# EAGLE board BMSafeSlave (EAGLE 5.08)
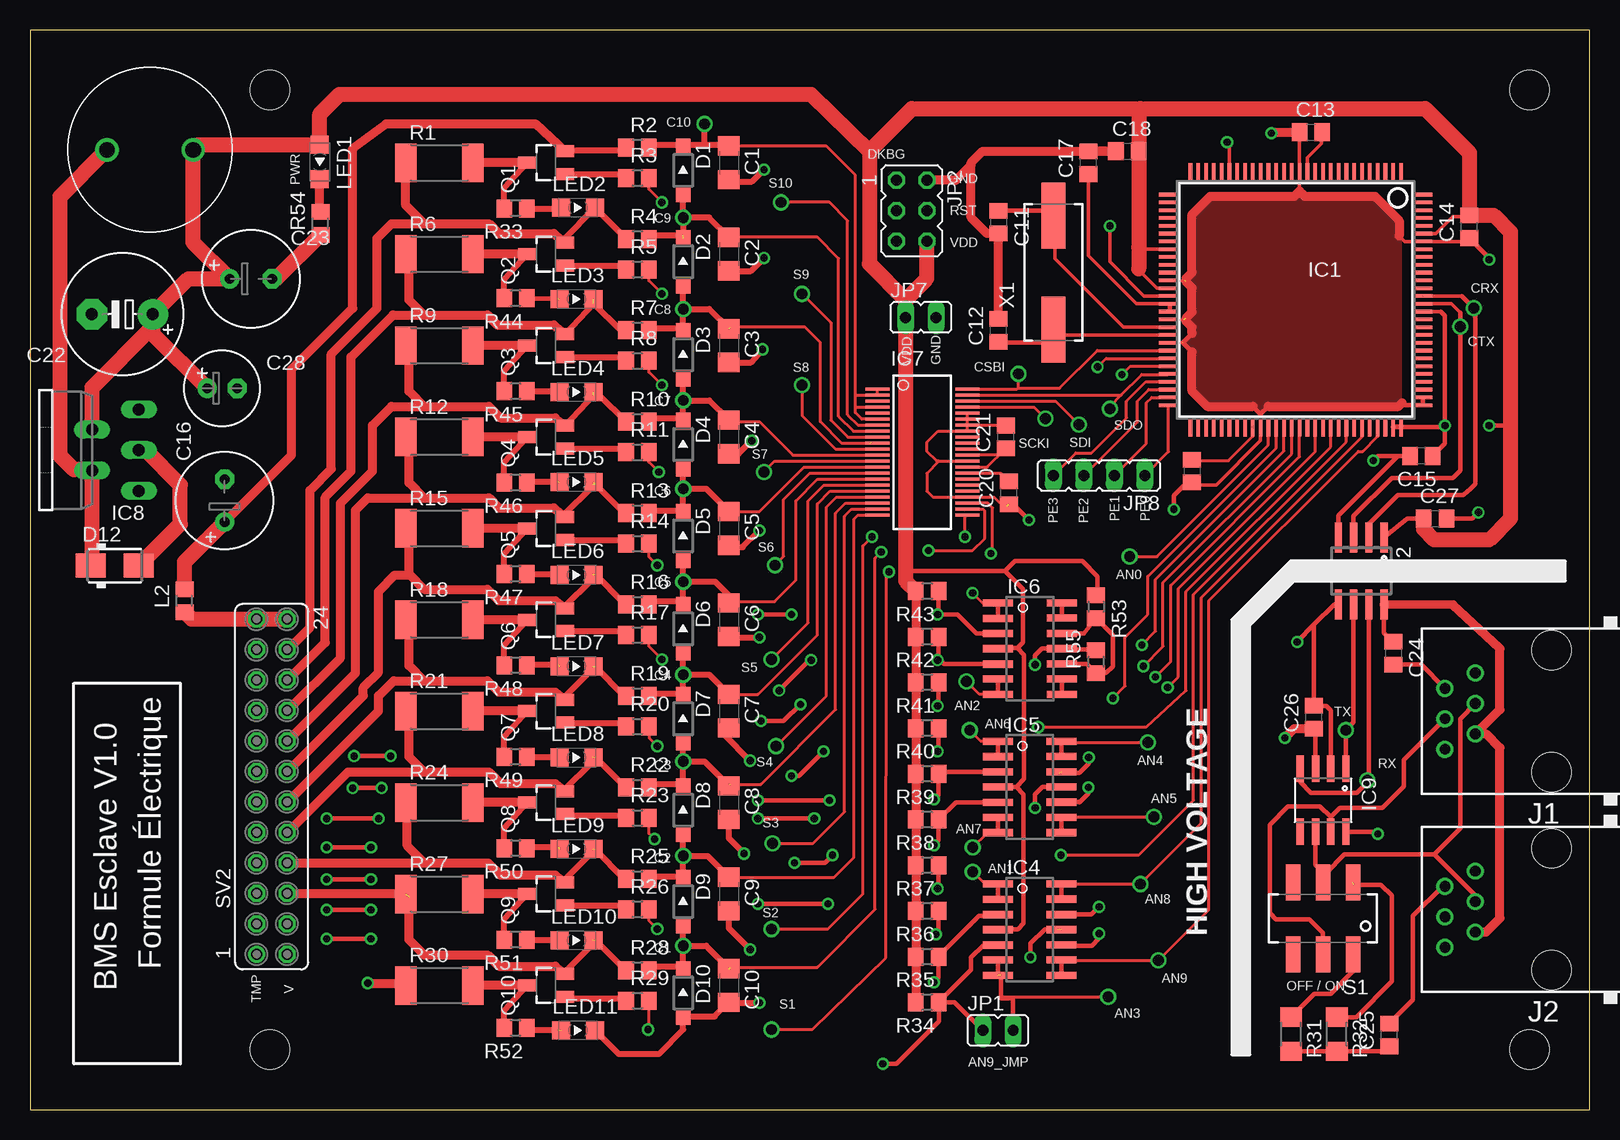
[diagram p0: board, top side]
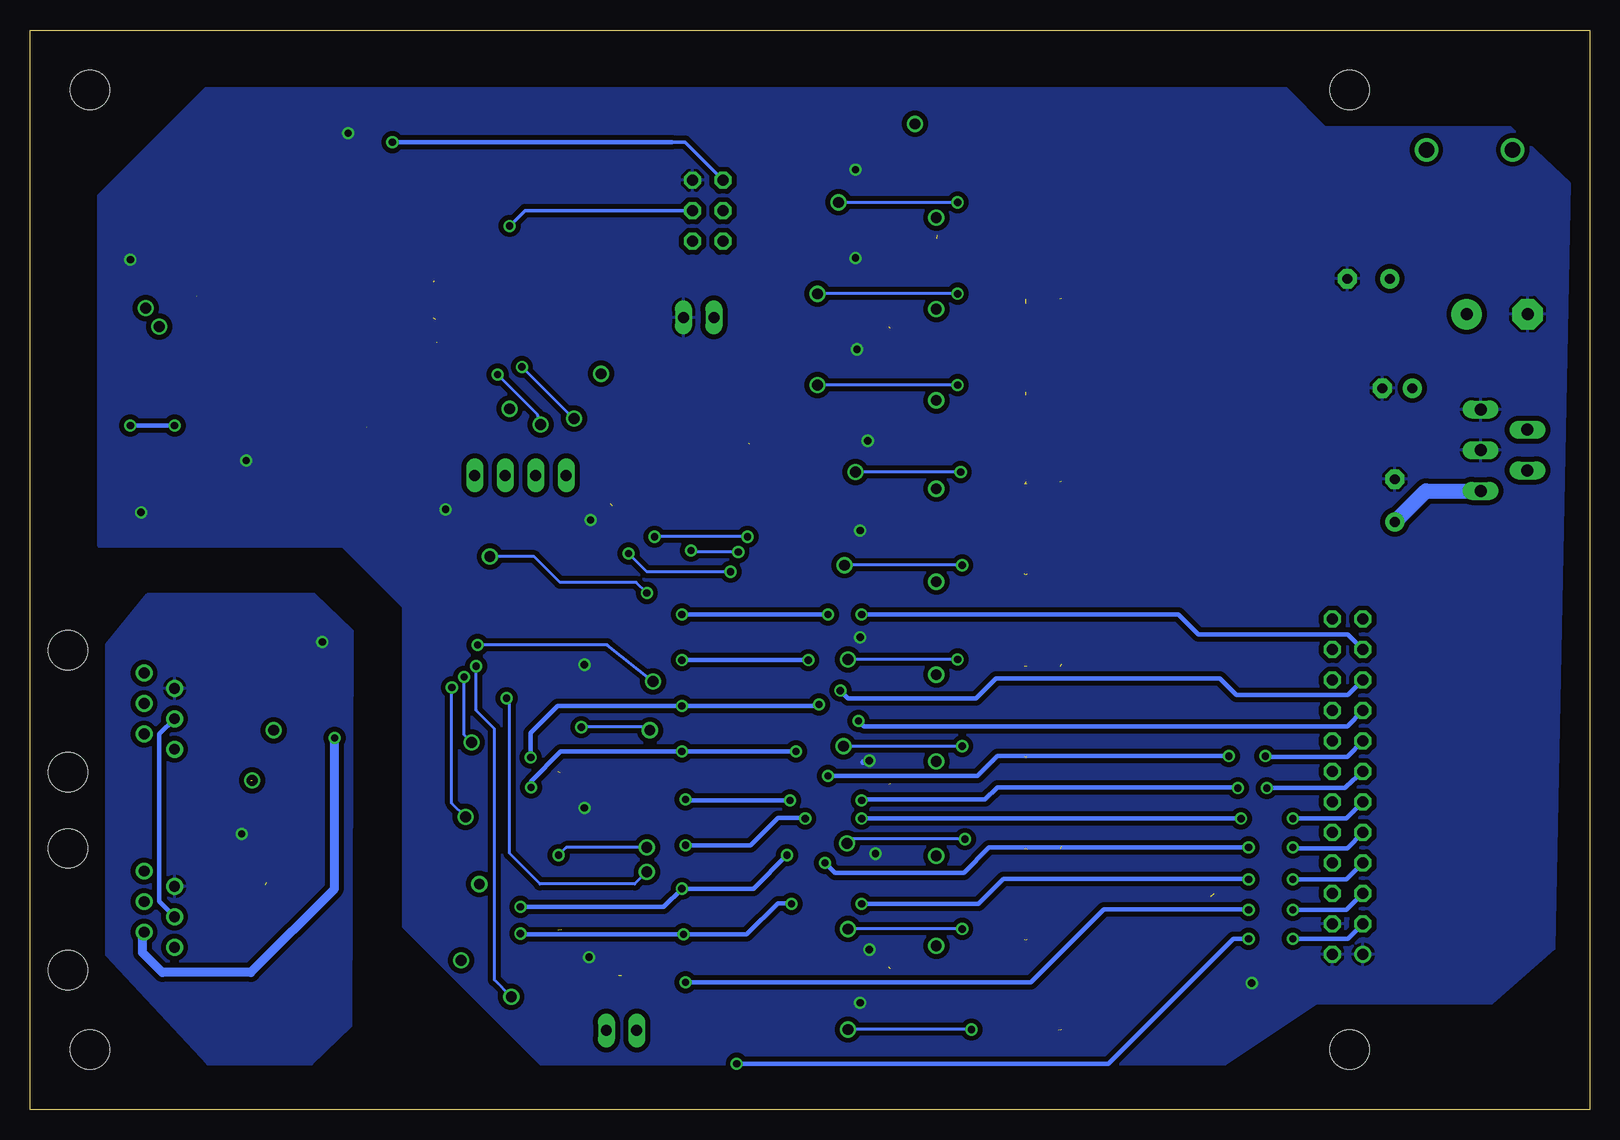
[diagram p1: board, bottom side, seen from below]

Size 130 x 90 mm. Coordinates in mm from the lower left corner, seen from the top.
Outline: 0,0 130,0 130,90 0,90 0,0
Copper layers (1*16): Top 0.035mm / dielectric 1.5mm / Bottom 0.035mm
Design rules "default *": minimum track width 8mil, minimum drill 23mil, track to track 8mil, track to pad 8mil, pad to pad 8mil, via to via 8mil, smd to smd 8mil, copper to edge 40mil, drill to drill 10mil, minimum pad ring 10mil, minimum via ring 8mil, stop-mask expansion 4mil, vias tented up to drill 0mil, thermal gap 10mil

## Footprints (pad centres in the part's own frame; a part is rotated, then mirrored left to right if it is on the bottom)
C1206 = smd 1.6 x 1.8: 1 -1.4,0; 2 1.4,0
C0805 = smd 1.3 x 1.5: 1 -0.95,0; 2 0.95,0
E3,5-8 = drill 0.813 pad 1.6 round: + -1.778,0 | drill 0.813 pad 1.6 octagon: - 1.778,0
E5-10,5 = drill 1.016 pad 2.54 round: + -2.54,0 | drill 1.016 pad 2.54 octagon: - 2.54,0
E2,5-6.3 = drill 0.813 pad 1.6 round: + -1.25,0 | drill 0.813 pad 1.6 octagon: - 1.25,0
SOD123 = smd 1.4 x 1.2: A 1.95,0; C -1.95,0
SMA = smd 2.5 x 2: A 2,0; C -2,0
SQFP-S-20X20-112 = smd 0.3 x 1.6: 1 -8.775,-10.6; 2 -8.125,-10.6; 3 -7.475,-10.6; 4 -6.825,-10.6; 5 -6.175,-10.6; 6 -5.525,-10.6; 7 -4.875,-10.6; 8 -4.225,-10.6; 9 -3.575,-10.6; 10 -2.925,-10.6; 11 -2.275,-10.6; 12 -1.625,-10.6; 13 -0.975,-10.6; 14 -0.325,-10.6; 15 0.325,-10.6; 16 0.975,-10.6; 17 1.625,-10.6; 18 2.275,-10.6; 19 2.925,-10.6; 20 3.575,-10.6; 21 4.225,-10.6; 22 4.875,-10.6; 23 5.525,-10.6; 24 6.175,-10.6; 25 6.825,-10.6; 26 7.475,-10.6; 27 8.125,-10.6; 28 8.775,-10.6; 57 8.775,10.6; 58 8.125,10.6; 59 7.475,10.6; 60 6.825,10.6; 61 6.175,10.6; 62 5.525,10.6; 63 4.875,10.6; 64 4.225,10.6; 65 3.575,10.6; 66 2.925,10.6; 67 2.275,10.6; 68 1.625,10.6; 69 0.975,10.6; 70 0.325,10.6; 71 -0.325,10.6; 72 -0.975,10.6; 73 -1.625,10.6; 74 -2.275,10.6; 75 -2.925,10.6; 76 -3.575,10.6; 77 -4.225,10.6; 78 -4.875,10.6; 79 -5.525,10.6; 80 -6.175,10.6; 81 -6.825,10.6; 82 -7.475,10.6; 83 -8.125,10.6; 84 -8.775,10.6 | smd 1.6 x 0.3: 29 10.6,-8.775; 30 10.6,-8.125; 31 10.6,-7.475; 32 10.6,-6.825; 33 10.6,-6.175; 34 10.6,-5.525; 35 10.6,-4.875; 36 10.6,-4.225; 37 10.6,-3.575; 38 10.6,-2.925; 39 10.6,-2.275; 40 10.6,-1.625; 41 10.6,-0.975; 42 10.6,-0.325; 43 10.6,0.325; 44 10.6,0.975; 45 10.6,1.625; 46 10.6,2.275; 47 10.6,2.925; 48 10.6,3.575; 49 10.6,4.225; 50 10.6,4.875; 51 10.6,5.525; 52 10.6,6.175; 53 10.6,6.825; 54 10.6,7.475; 55 10.6,8.125; 56 10.6,8.775; 85 -10.6,8.775; 86 -10.6,8.125; 87 -10.6,7.475; 88 -10.6,6.825; 89 -10.6,6.175; 90 -10.6,5.525; 91 -10.6,4.875; 92 -10.6,4.225; 93 -10.6,3.575; 94 -10.6,2.925; 95 -10.6,2.275; 96 -10.6,1.625; 97 -10.6,0.975; 98 -10.6,0.325; 99 -10.6,-0.325; 100 -10.6,-0.975; 101 -10.6,-1.625; 102 -10.6,-2.275; 103 -10.6,-2.925; 104 -10.6,-3.575; 105 -10.6,-4.225; 106 -10.6,-4.875; 107 -10.6,-5.525; 108 -10.6,-6.175; 109 -10.6,-6.825; 110 -10.6,-7.475; 111 -10.6,-8.125; 112 -10.6,-8.775
SOIC_N = smd 0.6 x 2.5: 1 -1.905,-2.79; 2 -0.635,-2.79; 3 0.635,-2.79; 4 1.905,-2.79; 5 1.905,2.79; 6 0.635,2.79; 7 -0.635,2.79; 8 -1.905,2.79
SO14 = smd 0.6 x 2.5: 1 -3.81,-2.65; 2 -2.53,-2.65; 3 -1.26,-2.65; 4 0,-2.65; 5 1.29,-2.65; 6 2.53,-2.65; 7 3.81,-2.65; 8 3.81,2.65; 9 2.53,2.65; 10 1.26,2.65; 11 0,2.65; 12 -1.26,2.65; 13 -2.55,2.65; 14 -3.81,2.65
LTC6802 = smd 2 x 0.25: A0 3.75,1.75; A1 3.75,2.25; A2 3.75,2.75; A3 3.75,3.25; C1 3.75,-4.75; C2 -3.75,-5.25; C3 -3.75,-4.25; C4 -3.75,-3.25; C5 -3.75,-2.25; C6 -3.75,-1.25; C7 -3.75,-0.25; C8 -3.75,0.75; C9 -3.75,1.75; C10 -3.75,2.75; C11 -3.75,3.75; C12 -3.75,4.75; CSBI 3.75,5.25; GPIO1 3.75,0.75; GPIO2 3.75,1.25; MMB 3.75,-0.25; NC 3.75,-3.25; S1 3.75,-4.25; S2 3.75,-5.25; S3 -3.75,-4.75; S4 -3.75,-3.75; S5 -3.75,-2.75; S6 -3.75,-1.75; S7 -3.75,-0.75; S8 -3.75,0.25; S9 -3.75,1.25; S10 -3.75,2.25; S11 -3.75,3.25; S12 -3.75,4.25; SCKI 3.75,3.75; SDI 3.75,4.25; SDO 3.75,4.75; TOS 3.75,-0.75; V+ -3.75,5.25; V- 3.75,-3.75; VREF 3.75,-1.75; VREG 3.75,-1.25; VTEMP1 3.75,-2.75; VTEMP2 3.75,-2.25; WDTB 3.75,0.25
TO220-51 = drill 1 long: 1 -3.4,-2.4; 2 -1.7,1.5; 3 0,-2.4; 4 1.7,1.5; 5 3.4,-2.4
SO8 = smd 0.61 x 2.21: 1 -1.905,-2.616; 2 -0.635,-2.616; 3 0.635,-2.616; 4 1.905,-2.616; 5 1.905,2.616; 6 0.635,2.616; 7 -0.635,2.616; 8 -1.905,2.616
RJ14 = drill 0.9 pad 1.4 round: 1 -3.175,8.89; 2 -1.905,6.35; 3 -0.635,8.89; 4 0.635,6.35; 5 1.905,8.89; 6 3.175,6.35 | hole 3.251: -5.08,0; 5.08,0
JP1 = drill 0.914 long: 1 0,-1.27; 2 0,1.27
JP3Q = drill 0.914 octagon: 1 -2.54,-1.27; 2 -2.54,1.27; 3 0,-1.27; 4 0,1.27; 5 2.54,-1.27; 6 2.54,1.27
STAND-OFF = hole 3.302: 0,0
JP4 = drill 0.914 long: 1 -3.81,0; 2 -1.27,0; 3 1.27,0; 4 3.81,0
18R105C = drill 1.3 round: 1 -3.6,0; 2 3.6,0
R0805 = smd 1.3 x 1.5: 1 -0.95,0; 2 0.95,0
1206_LED = smd 1.5 x 1.5: A -1.422,0; C 1.422,0
TSMT3 = smd 1 x 1.5: 1 -0.95,-1.6; 2 0.95,-1.6; 3 0,1.6
R2512 = smd 1.8 x 3.2: 1 -2.8,0; 2 2.8,0
R1206 = smd 1.6 x 1.803: 1 -1.422,0; 2 1.422,0
DPDT = smd 1.2 x 3: 1 -2.5,3; 2 0,3; 3 2.5,3; 4 -2.5,-3; 5 0,-3; 6 2.5,-3
FE12-2 = drill 0.914 round: 1 -13.97,1.27 | drill 0.914 octagon: 2 -13.97,-1.27; 3 -11.43,1.27; 4 -11.43,-1.27; 5 -8.89,1.27; 6 -8.89,-1.27; 7 -6.35,1.27; 8 -6.35,-1.27; 9 -3.81,1.27; 10 -3.81,-1.27; 11 -1.27,1.27; 12 -1.27,-1.27; 13 1.27,1.27; 14 1.27,-1.27; 15 3.81,1.27; 16 3.81,-1.27; 17 6.35,1.27; 18 6.35,-1.27; 19 8.89,1.27; 20 8.89,-1.27; 21 11.43,1.27; 22 11.43,-1.27; 23 13.97,1.27; 24 13.97,-1.27
CSM-7X = smd 5.5 x 2: 1 -4.75,0; 2 4.75,0

## Placement (x,y rotation side)
C1  100n  [C1206]  58.26,78.93 270 top
C2  100n  [C1206]  58.26,71.31 270 top
C3  100n  [C1206]  58.26,63.69 270 top
C4  100n  [C1206]  58.26,56.07 270 top
C5  100n  [C1206]  58.26,48.45 270 top
C6  100n  [C1206]  58.26,40.83 270 top
C7  100n  [C1206]  58.26,33.21 270 top
C8  100n  [C1206]  58.26,25.59 270 top
C9  100n  [C1206]  58.26,17.97 270 top
C10  100n  [C1206]  58.26,10.35 270 top
C11  18p  [C0805]  80.74,73.98 270 top
C12  18p  [C0805]  80.74,64.96 90 top
C13  220n  [C0805]  106.77,81.47 0 top
C14  100n  [C0805]  119.98,73.6 90 top
C15  100n  [C0805]  115.98,54.48 180 top
C16  100u  [E3,5-8]  16.22,50.77 90 top
C17  220n  [C0805]  88.23,78.93 90 top
C18  100n  [C0805]  91.47,79.88 0 top
C19  220n  [C0805]  96.87,53.23 270 top
C20  1u  [C0805]  81.6,51.42 90 top
C21  1u  [C0805]  81.35,56.07 90 top
C22  470u  [E5-10,5]  7.7,66.3 180 top
C23  220u  [E3,5-8]  18.41,69.25 0 top
C24  47n  [C0805]  113.63,38.04 270 top
C25  47n  [C0805]  113.31,6.22 90 top
C26  100n  [C0805]  107.03,32.7 90 top
C27  47n  [C0805]  117.12,49.28 0 top
C28  100u  [E2,5-6.3]  16.02,60.13 0 top
D1  DIODE_ZENER  [SOD123]  54.45,78.3 270 top
D2  DIODE_ZENER  [SOD123]  54.45,70.67 270 top
D3  DIODE_ZENER  [SOD123]  54.45,62.93 270 top
D4  DIODE_ZENER  [SOD123]  54.45,55.44 270 top
D5  DIODE_ZENER  [SOD123]  54.45,47.81 270 top
D6  DIODE_ZENER  [SOD123]  54.45,40.07 270 top
D7  DIODE_ZENER  [SOD123]  54.45,32.58 270 top
D8  DIODE_ZENER  [SOD123]  54.45,24.95 270 top
D9  DIODE_ZENER  [SOD123]  54.45,17.34 270 top
D10  DIODE_ZENER  [SOD123]  54.45,9.71 270 top
D12  MBRA340T3  [SMA]  7.08,45.34 0 top
IC1  MC9S12XD  [SQFP-S-20X20-112]  105.5,67.5 180 top
IC2  ADUM3211  [SOIC_N]  110.97,44.89 180 top
IC4  LM324DRG3D  [SO14]  83.33,15 270 top
IC5  LM324DRG3D  [SO14]  83.33,26.89 270 top
IC6  LM324DRG3D  [SO14]  83.36,38.42 270 top
IC7  LTC6802-2  [LTC6802]  74.39,54.8 0 top
IC8  TL2575_5  [TO220-51]  6.67,54.97 90 top
IC9  TJA1040  [SO8]  107.79,25.78 180 top
J1  RJ14  [RJ14]  126.84,33.21 90 top
J2  RJ14  [RJ14]  126.84,16.7 90 top
JP1  [JP1]  80.69,6.59 270 top
JP2  [JP3Q]  73.5,74.93 270 top
JP3  STAND-OFF  [STAND-OFF]  125,85 0 top
JP4  STAND-OFF  [STAND-OFF]  20,85 0 top
JP5  STAND-OFF  [STAND-OFF]  125,5 0 top
JP6  STAND-OFF  [STAND-OFF]  20,5 0 top
JP7  [JP1]  74.26,66.04 270 top
JP8  [JP4]  89.12,52.86 180 top
L1  1000u  [18R105C]  10,80.01 0 top
L2  [R0805]  12.88,42.42 90 top
LED1  LED  [1206_LED]  24.16,79 270 top
LED2  LED  [1206_LED]  45.69,75.18 0 top
LED3  LED  [1206_LED]  45.56,67.56 0 top
LED4  LED  [1206_LED]  45.56,59.82 0 top
LED5  LED  [1206_LED]  45.56,52.32 0 top
LED6  LED  [1206_LED]  45.56,44.58 0 top
LED7  LED  [1206_LED]  45.56,36.96 0 top
LED8  LED  [1206_LED]  45.56,29.34 0 top
LED9  LED  [1206_LED]  45.56,21.72 0 top
LED10  LED  [1206_LED]  45.56,14.1 0 top
LED11  LED  [1206_LED]  45.69,6.6 0 top
Q1  PMOS  [TSMT3]  43.02,78.93 90 top
Q2  PMOS  [TSMT3]  43.02,71.31 90 top
Q3  PMOS  [TSMT3]  43.02,63.69 90 top
Q4  PMOS  [TSMT3]  43.02,56.07 90 top
Q5  PMOS  [TSMT3]  43.02,48.45 90 top
Q6  PMOS  [TSMT3]  43.02,40.83 90 top
Q7  PMOS  [TSMT3]  43.02,33.21 90 top
Q8  PMOS  [TSMT3]  43.02,25.59 90 top
Q9  PMOS  [TSMT3]  43.02,17.97 90 top
Q10  PMOS  [TSMT3]  43.02,10.35 90 top
R1  10  [R2512]  34.13,78.93 0 top
R2  100  [R0805]  50.64,80.2 0 top
R3  3.3k  [R0805]  50.64,77.66 0 top
R4  100  [R0805]  50.64,72.58 0 top
R5  3.3k  [R0805]  50.64,70.04 0 top
R6  10  [R2512]  34.13,71.31 0 top
R7  100  [R0805]  50.64,64.96 0 top
R8  3.3k  [R0805]  50.64,62.42 0 top
R9  10  [R2512]  34.13,63.69 0 top
R10  100  [R0805]  50.64,57.34 0 top
R11  3.3k  [R0805]  50.64,54.8 0 top
R12  10  [R2512]  34.13,56.07 0 top
R13  100  [R0805]  50.64,49.72 0 top
R14  3.3k  [R0805]  50.64,47.18 0 top
R15  10  [R2512]  34.13,48.45 0 top
R16  100  [R0805]  50.64,42.1 0 top
R17  3.3k  [R0805]  50.64,39.56 0 top
R18  10  [R2512]  34.13,40.83 0 top
R19  100  [R0805]  50.64,34.48 0 top
R20  3.3k  [R0805]  50.64,31.94 0 top
R21  10  [R2512]  34.13,33.21 0 top
R22  100  [R0805]  50.64,26.86 0 top
R23  3.3k  [R0805]  50.64,24.32 0 top
R24  10  [R2512]  34.13,25.59 0 top
R25  100  [R0805]  50.64,19.24 0 top
R26  3.3k  [R0805]  50.64,16.7 0 top
R27  10  [R2512]  34.13,17.97 0 top
R28  100  [R0805]  50.64,11.62 0 top
R29  3.3k  [R0805]  50.64,9.08 0 top
R30  10  [R2512]  34.13,10.35 0 top
R31  60.4  [R1206]  105.12,6.29 270 top
R32  60.4  [R1206]  108.93,6.29 270 top
R33  475  [R0805]  40.48,75.12 180 top
R34  3k  [R0805]  74.8,8.93 180 top
R35  3k  [R0805]  74.8,12.74 180 top
R36  3k  [R0805]  74.8,16.55 180 top
R37  3k  [R0805]  74.8,20.36 180 top
R38  3k  [R0805]  74.8,24.17 180 top
R39  3k  [R0805]  74.8,27.98 180 top
R40  3k  [R0805]  74.8,31.79 180 top
R41  3k  [R0805]  74.8,35.6 180 top
R42  3k  [R0805]  74.8,39.41 180 top
R43  3k  [R0805]  74.8,43.22 180 top
R44  475  [R0805]  40.48,67.63 180 top
R45  475  [R0805]  40.48,59.88 180 top
R46  475  [R0805]  40.48,52.26 180 top
R47  475  [R0805]  40.48,44.64 180 top
R48  475  [R0805]  40.48,37.02 180 top
R49  475  [R0805]  40.48,29.4 180 top
R50  475  [R0805]  40.48,21.78 180 top
R51  475  [R0805]  40.48,14.16 180 top
R52  475  [R0805]  40.48,6.79 180 top
R53  3.3k  [R0805]  88.87,41.91 270 top
R54  475  [R0805]  24.21,73.88 90 top
R55  3.3k  [R0805]  88.87,37.34 90 top
S1  SWITCH_DPDT  [DPDT]  107.79,15.94 180 top
SV2  [FE12-2]  20.15,26.91 90 top
X1  CSM-7X  [CSM-7X]  85.31,69.79 90 top

## Library data of the parts
C1-C27 L2 R1-R55 = rcl
C28 D1-D10 IC1 IC2 IC4-IC9 J1 J2 LED1-LED11 Q1-Q10 S1 X1 = ELE4000_BMS
D12 = diode
JP1 JP2 JP7 JP8 = jumper
JP3-JP6 = SparkFun
L1 = bobineMurata
SV2 = con-lsta

## Nets
5V_BUS: C24.1 C26.1 IC2.8 IC9.3 J1.2 J2.2
5V_SLV: C14.2 C15.1 C18.2 C22.+ C23.+ C27.1 C28.+ IC1.36 IC1.41 IC1.83 IC1.84 IC1.97 IC1.107 IC2.1 IC4.4 IC5.4 IC6.4 IC8.4 JP2.6 JP7.1 L1.2 LED1.A R34.2 R35.2 R36.2 R37.2 R38.2 R39.2 R40.2 R41.2 R42.2 R43.2 R53.1
AN0: IC1.67 IC6.1 IC6.2
AN1: IC1.69 IC6.6 IC6.7
AN2: IC1.71 IC5.13 IC5.14
AN3: IC1.73 IC5.8 IC5.9
AN4: IC1.75 IC5.1 IC5.2
AN5: IC1.77 IC5.6 IC5.7
AN6: IC1.79 IC4.13 IC4.14
AN7: IC1.81 IC4.8 IC4.9
AN8: IC1.68 IC4.1 IC4.2
AN9: IC1.70 IC4.6 IC4.7 JP1.2
BKGD: IC1.23 JP2.1
CSBI: IC1.49 IC7.CSBI
EXTAL: C11.1 IC1.46 X1.2
GND_BUS: C24.2 C25.2 C26.2 IC2.5 IC9.2 IC9.8 J1.5 J2.5
GND_SLV: C1.2 C2.2 C3.2 C4.2 C5.2 C6.2 C7.2 C8.2 C9.2 C10.2 C11.2 C12.2 C13.1 C14.1 C15.2 C16.- C17.2 C18.1 C19.2 C20.1 C21.2 C22.- C23.- C27.2 C28.- D10.A D12.A IC1.14 IC1.40 IC1.45 IC1.48 IC1.66 IC1.85 IC1.86 IC1.106 IC2.4 IC4.11 IC5.11 IC6.11 IC7.A0 IC7.A1 IC7.A2 IC7.A3 IC7.TOS IC7.V- IC8.3 IC8.5 JP2.2 JP7.2 LED11.C R30.1 R54.1 R55.2 SV2.1 SV2.2 SV2.4
N$1: IC7.S5 R17.2
N$2: IC7.S10 R3.2
N$3: L2.1 SV2.23 SV2.24
N$4: Q1.3 R1.2 R33.2
N$5: D12.C IC8.2 L1.1
N$6: IC7.S9 R5.2
N$7: LED1.C R54.2
N$8: LED5.C Q5.2 R12.1 R13.1 SV2.16
N$9: IC4.5 JP1.1 R34.1 SV2.3
N$10: C20.2 IC7.VREF
N$11: IC6.13 IC6.14
N$12: IC6.8 IC6.9
N$13: R31.1 S1.1
N$14: Q1.1 R3.1
N$15: Q2.1 R5.1
N$16: Q2.3 R6.2 R44.2
N$17: LED2.C Q2.2 R1.1 R4.1 SV2.22
N$18: IC6.10 IC6.12 R53.2 R55.1
N$19: IC7.S8 R8.2
N$21: R32.1 S1.4
N$22: IC2.6 IC9.1
N$23: Q3.1 R8.1
N$24: Q3.3 R9.2 R45.2
N$25: LED3.C Q3.2 R6.1 R7.1 SV2.20
N$27: C16.+ IC8.1 L2.2 Q1.2 R2.1
N$28: C6.1 D5.A D6.C IC7.C5 R16.2
N$29: IC2.7 IC9.4
N$30: IC9.6 J1.4 J2.4 S1.5
N$31: IC9.7 J1.3 J2.3 S1.2
N$32: C25.1 R31.2 R32.2
N$33: Q4.1 R11.1
N$34: Q4.3 R12.2 R46.2
N$35: IC4.10 R36.1 SV2.7
N$37: LED4.C Q4.2 R9.1 R10.1 SV2.18
N$38: IC7.S6 R14.2
N$39: C7.1 D6.A D7.C IC7.C4 R19.2
N$41: IC7.S7 R11.2
N$42: IC4.12 R37.1 SV2.9
N$43: Q5.1 R14.1
N$44: Q5.3 R15.2 R47.2
N$45: C21.1 IC7.MMB IC7.VREG
N$46: LED11.A R52.1
N$47: C10.1 D9.A D10.C IC7.C1 R28.2
N$48: LED10.A R51.1
N$49: LED9.A R50.1
N$50: LED8.A R49.1
N$51: LED7.A R48.1
N$52: Q6.1 R17.1
N$53: Q6.3 R18.2 R48.2
N$54: LED6.C Q6.2 R15.1 R16.1 SV2.14
N$55: IC7.S4 R20.2
N$56: C8.1 D7.A D8.C IC7.C3 R22.2
N$57: LED6.A R47.1
N$58: Q7.1 R20.1
N$59: Q7.3 R21.2 R49.2
N$60: LED7.C Q7.2 R18.1 R19.1 SV2.12
N$61: IC7.S3 R23.2
N$62: C5.1 D4.A D5.C IC7.C6 R13.2
N$63: LED5.A R46.1
N$64: Q8.1 R23.1
N$65: LED4.A R45.1
N$66: Q8.3 R24.2 R50.2
N$67: LED8.C Q8.2 R21.1 R22.1 SV2.10
N$68: IC7.S2 R26.2
N$69: LED3.A R44.1
N$70: LED2.A R33.1
N$71: Q9.1 R26.1
N$72: Q9.3 R27.2 R51.2
N$73: LED9.C Q9.2 R24.1 R25.1 SV2.8
N$75: C9.1 D8.A D9.C IC7.C2 R25.2
N$76: IC5.5 R38.1 SV2.11
N$77: Q10.1 R29.1
N$78: Q10.3 R30.2 R52.2
N$79: LED10.C Q10.2 R27.1 R28.1 SV2.6
N$80: IC7.S1 R29.2
N$81: C4.1 D3.A D4.C IC7.C7 R10.2
N$82: C3.1 D2.A D3.C IC7.C8 R7.2
N$83: C2.1 D1.A D2.C IC7.C9 R4.2
N$84: C1.1 D1.C IC7.C10 IC7.C11 IC7.C12 IC7.V+ R2.2
N$85: IC5.3 R39.1 SV2.13
N$86: IC5.10 R40.1 SV2.15
N$87: IC5.12 R41.1 SV2.17
N$88: IC6.5 R42.1 SV2.19
N$89: IC6.3 R43.1 SV2.21
N$132: IC4.3 R35.1 SV2.5
PE0: IC1.56 JP8.1
PE1: IC1.55 JP8.2
PE2: IC1.54 JP8.3
PE3: IC1.53 JP8.4
RST: IC1.42 JP2.4
RXCAN_SLV: IC1.99 IC2.2
SCKI: IC1.50 IC7.SCKI
SDI: IC1.51 IC7.SDI
SDO: IC1.52 IC7.SDO
TXCAN_SLV: IC1.98 IC2.3
VDD1: C13.2 IC1.13
VDD2: C19.1 IC1.65
VDDPLL: C17.1 IC1.43 IC1.44
XTAL: C12.1 IC1.47 X1.1

## Tracks (layer width: path | path; a pad name or v marks a point on that pad's centre or on a via)
5V_BUS  (via drill 0.6)
  Top 0.381: IC2.8 112.87,39.75 C24.1 | IC9.3 107.16,31.62 C26.1
  Top 0.762: J2.2 121.38,14.79 122.52,15.94 122.52,30.16 121.38,31.3 J1.2 122.52,33.34 122.52,38.42 118.61,42.07 IC2.8 | C26.1 105.38,31.75 v104.61,30.99
  Bottom 0.381: 120.62,14.67 J2.2
  Bottom 0.762: v104.61,30.99 104.61,18.41 111.6,11.43 118.97,11.43 120.62,13.08 120.62,14.67
5V_SLV  (via drill 0.6)
  Top 0.203: R34.2 73.98,9.06 73.51,9.06 | R35.2 73.98,12.6 | R43.2 74.08,43.46 | 73.78,20.31 73.84,20.24 | 73.98,12.59 73.84,12.45 | 80.95,15.02 IC4.4 | IC1.84 114.28,56.83
  Top 0.254: R34.2 73.98,8.93 | R35.2 73.98,12.59 | R36.2 73.78,16.65 | R37.2 73.78,20.31 | 73.98,43.47 73.98,43.27 R43.2 | 81.01,38.47 IC6.4
  Top 0.305: IC1.41 93.92,68.47 92.42,69.98 | 92.58,71.72 IC1.36 | 117.59,66.53 IC1.97 | IC1.107 117.19,73.03 118.58,74.42 119.86,74.42
  Top 0.381: 82.31,38.47 82.77,38.92 82.77,43.4 81.27,44.89 | 82.31,38.47 81.01,38.47 | 82.21,26.89 IC5.4 | 82.21,26.89 82.87,27.55 82.87,37.91 82.31,38.47 | 82.21,26.89 82.82,26.28 82.82,15.51 82.34,15.02 80.95,15.02 | 81.27,44.89 82.1,45.72 87.72,45.72 88.99,44.45 88.99,42.99 R53.1 | 92.42,71.88 92.58,71.72 | 117.59,66.53 117.95,66.17 117.95,57.15 | C14.2 119.86,74.42 | IC2.1 114.81,49.28 C27.1 | 81.27,44.89 73.06,44.89 72.99,44.96 | 92.42,70.1 92.42,69.98 | 117.95,57.15 117.7,56.9 IC1.84 | C15.1 117.95,55.5 v117.95,57.02 117.95,57.15 | 123.41,57.02 v121.63,57.02
  Top 0.406: IC1.84 IC1.83
  Top 0.762: R43.2 R42.2 R41.2 R40.2 R39.2 R38.2 R37.2 | 73.84,20.24 R36.2 R35.2 | 73.84,12.45 R34.2 | 92.55,83.44 92.42,83.31 | 115.92,49.02 C27.1
  Top 1.016: 92.42,71.88
  Top 1.27: 69.97,79.92 65.12,84.64 25.81,84.64 24.16,83 LED1.A 14.01,80.42 L1.2 13.6,72.29 C23.+ 13.19,69.25 C22.+ | 69.97,79.92 73.5,83.44 92.55,83.44 116.3,83.44 119.98,79.76 C14.2 122.02,74.55 123.41,73.15 123.41,57.02 123.41,49.28 121.63,47.5 117.06,47.5 116.17,48.39 C27.1 | 92.42,83.31 C18.2 92.42,71.88 | 69.97,79.92 69.97,70.52 72.99,67.5 | R43.2 72.99,44.07 72.99,44.96 JP7.1 72.99,67.5 | 92.42,71.88 92.42,70.1 | 72.99,67.5 74.77,69.28 JP2.6 | C22.+ 10.24,64.66 C28.+ | C22.+ 10.24,65.26 5.17,60.2 IC8.4
  Bottom 0.381: v121.63,57.02 v117.95,57.02
AN0  (via drill 0.6, 0.9)
  Top 0.203: 80.1,42.35 80.83,42.35 IC6.1
  Top 0.254: 80.87,42.32 IC6.1 79.41,42.23 v78.58,43.05 | v91.66,46.1 93.95,46.1 103.23,55.38 IC1.67
  Top 0.381: IC6.1 IC6.2
  Bottom 0.254: v91.66,46.1 87.98,46.1 85.82,43.94 79.47,43.94 v78.58,43.05
AN1  (via drill 0.6, 0.9)
  Top 0.203: IC6.7 81.25,34.61 81.37,34.48
  Top 0.254: IC1.69 104.53,54.91 93.82,44.2 93.82,39.88 v92.68,38.73 | v78.07,35.69 79.15,34.61 IC6.7
  Top 0.381: IC6.7 IC6.6
  Bottom 0.254: v92.68,38.73 81.88,38.73 v78.07,35.69
AN2  (via drill 0.6, 0.9)
  Top 0.254: IC1.71 105.83,54.43 95.09,43.69 95.09,37.34 v93.82,36.07 | v93.19,30.61 85.82,30.61 IC5.14
  Top 0.381: IC5.13 IC5.14
  Bottom 0.254: v93.82,36.07 93.82,31.24 v93.19,30.61
AN3  (via drill 0.6, 0.9)
  Top 0.254: IC1.73 107.13,54.84 95.72,43.43 95.72,36.07 v94.84,35.18 | v93.69,24.38 85.76,24.38 IC5.9
  Top 0.381: IC5.8 IC5.9
  Bottom 0.254: v94.84,35.18 94.84,25.53 v93.69,24.38
AN4  (via drill 0.6 pad 0.3, 0.9)
  Top 0.254: IC1.75 108.43,55.25 96.36,43.18 96.36,34.92 93.06,31.88 v84.04,31.88 | v78.33,31.62 79.25,30.7 IC5.1
  Top 0.381: IC5.2 IC5.1
  Bottom 0.254: v84.04,31.88 78.58,31.88 v78.33,31.62
AN5  (via drill 0.6, 0.9)
  Top 0.254: IC1.77 109.73,55.66 97,42.93 97,25.78 92.42,21.21 v85.95,21.21 | 80.74,22.89 IC5.7 79.81,23.07 v78.58,21.84
  Top 0.381: IC5.7 IC5.6
  Bottom 0.254: v78.58,21.84 85.31,21.84 v85.95,21.21
AN6  (via drill 0.9)
  Top 0.254: 85.74,18.8 v92.55,18.8 97.63,23.88 97.63,42.67 111.03,56.07 IC1.79
  Top 0.305: IC4.14 85.74,18.8
  Top 0.381: IC4.13 IC4.14
AN7  (via drill 0.9)
  Top 0.254: IC1.81 112.36,56.87 112.36,56.13 111.09,54.86 110.71,54.86 98.27,42.42 98.27,16.64 v94.07,12.45 85.75,12.45 IC4.9
  Top 0.381: IC4.8 IC4.9
AN8  (via drill 0.6, 0.9)
  Top 0.254: IC1.68 103.88,55.14 93.19,44.45 93.19,41.27 91.28,39.37 91.28,35.31 v90.26,34.29 | v78.58,19.81 79.58,18.81 IC4.1
  Top 0.381: IC4.2 IC4.1
  Bottom 0.254: v78.58,19.81 79.58,18.81 87.48,18.81 90.01,21.34 90.01,34.04 v90.26,34.29
AN9  (via drill 0.6, 0.9)  (1 unrouted)
  Top 0.254: IC1.70 105.18,54.67 94.45,43.94 94.45,38.61 v92.8,36.96 | v89.88,9.4 81.06,9.4 80.93,9.27
  Top 0.381: IC4.7 IC4.6 | 80.92,11.19 80.93,9.27 81.95,9.27 JP1.2
  Bottom 0.254: v92.8,36.96 92.8,33.27 91.28,31.75 91.28,10.79 v89.88,9.4
BKGD  (via drill 0.6)
  Top 0.305: IC1.23 99.98,80.45 v99.79,80.64
  Bottom 0.305: 76.48,80.64 75.41,80.64 JP2.1
  Bottom 0.381: 76.48,80.64 v99.79,80.64
CSBI  (via drill 0.9)
  Top 0.254: IC1.49 88.96,63.27 85.82,60.13 82.35,60.13 | 82.35,60.13 82.39,60.17 v82.39,61.34 | IC7.CSBI 82.27,60.05 82.35,60.13
EXTAL
  Top 0.254: 85.44,74.41 X1.2 84.92,74.93
  Top 0.305: IC1.46 91.14,65.22 85.44,70.93 85.44,74.41
  Top 0.381: C11.1 84.92,74.93
GND_BUS  (via drill 0.6)
  Top 0.381: C25.2 115.28,9.14 115.28,16.13 117.76,18.61 J2.5 | C24.2 115.98,37.09 J1.5 | 107.03,40.42 C26.2 108.05,33.65 108.42,33.27 IC9.2 | IC9.8 112.18,23.16 v112.36,22.99 | v105.63,38.99 105.63,39.02 107.03,40.42 | 107.03,40.42 108.71,42.1 IC2.5
  pour Bottom (isolate 0.406): 103.09,39.88 106.27,42.93 120.23,42.93 123.67,38.73 123.67,12.9 115.21,3.81 106.52,3.81 103.22,6.99
GND_SLV  (via drill 0.6, 0.6 pad 0.3)  (5 unrouted)
  Top 0.203: IC1.85 116.03,58.73 | 102.58,57.98 102.56,58.05 | 58.77,77.15 58.36,77.56 C1.2
  Top 0.254: 96.06,63.94 95.04,63.94 IC1.48 | 105.81,81.42 C13.1 | 105.81,78.17 IC1.14 105.83,76.57 | C12.2 80.81,65.98 | 58.26,24.32 C8.2 | C7.2 58.26,31.64 | C6.2 58.26,39.36 | 58.26,46.88 C5.2 58.26,47.08 | C1.2 58.26,77.36 | 31.23,10.5 R30.1 31.44,10.3 | C10.2 58.26,8.88 | 58.26,16.39 C9.2 | IC6.11 85.68,38.34 | IC1.45 96.21,65.88 | IC1.40 96.26,69.12 | 102.61,58 102.58,57.98 | 88.81,38.34 R55.2 | IC1.66 | IC7.A1 81.32,57.05 C21.2 | 81.42,50.29 81.12,50.29 80.36,51.05 IC7.V- 75.28,51.05 74.77,51.56 74.77,53.03 75.79,54.05 | IC7.A3 IC7.A2 IC7.A1 | IC7.A1 IC7.A0 75.69,56.55 74.77,55.63 74.77,54.86 75.58,54.05 75.79,54.05 | 75.79,54.05 IC7.TOS
  Top 0.305: 114.14,72.83 114.6,72.38 IC1.106 119.71,72.38 | IC1.66 102.58,55.75 98.9,52.07 97.07,52.07 | 105.81,81.42 105.81,76.53 105.89,76.45
  Top 0.381: 57.88,32.06 57.88,32.19 C7.2 | R54.1 24.16,72.75 | 31.34,9.08 R30.1 | 96.87,63.18 96.11,63.94 96.87,64.71 | 101.95,58.61 102.58,57.98 | 85.68,38.34 88.81,38.34 | 102.61,58 103.22,58.61 | 119.71,72.38 C14.1 121.63,71 v121.63,70.87 | 114.39,58.93 114.6,58.73 IC1.85 IC1.86 | 97.07,52.07 C19.2 96.44,52.27 95.34,51.18 v95.34,50.04 | IC6.11 84.36,38.42 83.79,37.85 v83.79,37.08 | IC5.11 84.38,26.89 83.79,26.29 v83.79,25.15 | 85.7,15.02 84.59,15.02 83.41,13.84 v83.41,12.7 | IC2.4 109.06,49.53 114.01,54.48 | 114.01,54.48 C15.2 | C27.2 120.24,49.28 v120.74,49.78 | 114.01,54.48 112.36,54.48 v111.98,54.1 | C20.1 81.96,50.47 v83.28,49.15
  Top 0.508: LED11.C 49.08,4.63 52.42,4.63 54.45,6.67 D10.A 57.08,7.76 C10.2 58.06,8.75 | 58.26,77.36 60.18,77.36 v61.18,78.36 | C2.2 60.1,69.91 v61.18,70.99 | C3.2 60.1,62.29 v61.05,63.37 | C4.2 59.08,54.67 v60.16,55.75 | 58.26,46.88 59.41,46.88 v60.8,48.26 | 58.26,39.36 60.79,39.36 v60.8,39.37 | 58.26,16.39 58.26,15.11 v60.04,13.34 | 58.26,24.32 58.26,22.61 v59.53,21.34 | 57.88,32.19 57.88,31.24 v60.04,29.08 | 31.2,10.54 31.23,10.5 | 58.26,8.88 60.79,8.88 v60.8,8.89
  Top 0.762: 78.45,78.74 78.45,74.36 79.78,73.03 C11.2 C12.2 | 78.45,78.74 78.45,78.93 79.41,79.88 90.01,79.88 | 105.83,76.57 105.39,76.14 98.39,76.14 96.87,74.61 96.87,69.79 96.36,69.28 | 96.87,63.18 96.87,59.88 98.14,58.61 101.95,58.61 | 96.87,64.71 96.87,65.21 96.36,65.72 | 96.36,65.98 96.87,66.48 96.87,68.52 96.36,69.02 | 105.76,76.39 106.01,76.39 106.27,76.14 112.11,76.14 114.14,74.1 114.14,72.83 | 105.81,81.42 103.48,81.42 v103.47,81.41 | 103.22,58.61 114.08,58.61 114.39,58.93 | 46.98,6.48 LED11.C 47.21,6.5 | 90.01,79.88 C18.1 | C17.2 90.01,79.88 | v28.16,10.54 31.2,10.54 | JP2.2 77.18,77.47 78.45,78.74
  Top 1.27: D12.A 12.54,48.8 12.54,52.07 9.64,54.97 IC8.3 | C23.- 20.54,69.25 R54.1
  Bottom 0.381: v121.63,70.87 121.76,70.74 | v95.34,50.04 95.09,49.78
  Bottom 0.508: v60.04,29.08 60.55,28.96
  pour Top: 105.5,76.2 98.39,76.2 96.87,74.68 96.87,69.6 96.49,69.22 96.49,69.09 97,68.58 97,66.67 96.87,66.55 96.87,66.42 96.36,65.91 96.36,65.66 96.87,65.15 96.87,64.77 96.11,64.01 96.11,63.75 96.74,63.12 96.74,60.07 98.27,58.55 102.2,58.55 102.58,58.17 102.71,58.17 103.09,58.55 114.27,58.55 114.27,73.91 111.98,76.2 106.27,76.2 105.89,76.58
  pour Bottom (isolate 0.406): 2.92,13.42 1.65,77.22 6.57,81.87 22.02,81.87 25.24,85.09 115.41,85.09 124.3,76.2 124.3,46.99 103.98,46.99 98.9,41.91 98.9,15.24 87.47,3.81 30.32,3.81 22.7,8.89 8.12,8.89
N$1  (via drill 0.6, 0.9)
  Top 0.254: R17.2 51.59,38.61 v52.67,37.53 | v61.82,37.53 64.86,40.58 64.86,50.74 66.18,52.05 IC7.S5
  Bottom 0.254: v52.67,37.53 v61.82,37.53
N$2  (via drill 0.6 pad 0.3, 0.9)
  Top 0.254: 51.76,77.56 R3.2 51.59,76.71 v52.67,75.63 | v62.6,75.63 66.64,75.63 68.17,74.1 68.17,57.91 69.03,57.05 IC7.S10
  Bottom 0.254: v62.6,75.63 v52.67,75.63
N$3
  Top 1.27: SV2.24 SV2.23 13.47,40.88 L2.1
N$4
  Top 0.508: Q1.3 39.53,76.84 R33.2
  Top 0.762: Q1.3 R1.2
N$5
  Top 1.27: D12.C 5.17,45.43 IC8.2 5.11,53.34 3.65,53.34 2.51,54.48 2.51,76.12 L1.1
N$6  (via drill 0.6 pad 0.3, 0.9)
  Top 0.254: R5.2 51.59,69.09 v52.67,68.01 | IC7.S9 68.19,56.05 66.77,57.47 66.77,65.59 v64.36,68.01
  Bottom 0.254: v52.67,68.01 v64.36,68.01
N$7
  Top 0.762: LED1.C 24.16,74.75 R54.2
N$8  (2 unrouted)
  Top 0.203: 31.59,55.81 R12.1
  Top 0.254: 46.88,51.95 46.88,52.16 | 44.44,49.52 Q5.2 44.24,49.52 | R13.1 49.52,49.72 | R12.1 31.44,56.02
  Top 0.381: SV2.16 21.43,30.67
  Top 0.508: 44.44,49.52 46.88,51.95 | 49.52,49.72 47.08,52.16
  Top 0.762: 32.86,50.99 31.59,52.26 31.59,55.81 | 21.43,30.67 27.14,36.38 27.14,49.97 28.16,50.99 32.86,50.99 | 32.86,50.99 38.26,50.99 39.08,50.16 43.66,50.16 Q5.2
N$9  (via drill 0.6 pad 0.3)
  Top 0.381: v71.09,3.81 72.23,3.81 75.79,7.37 75.79,8.89 R34.1 | R34.1 77.08,8.93 JP1.1 | R34.1 78.45,11.63 78.45,12.7 79.46,13.71 IC4.5 | v24.73,14.22 v28.41,14.22
  Bottom 0.381: SV2.3 20.14,14.22 v24.73,14.22 | v71.09,3.81 40.1,3.81 29.68,14.22 v28.41,14.22
N$10
  Top 0.254: IC7.VREF 80.92,53.05 C20.2
N$11
  Top 0.381: IC6.14 IC6.13
N$12
  Top 0.381: IC6.8 IC6.9
N$13
  Top 0.381: R31.1 107.07,9.65 108.42,9.65 110.29,11.52 S1.1
N$14
  Top 0.254: 49.37,77.98 R3.1
  Top 0.508: Q1.1 49.37,77.98
N$15
  Top 0.254: 49.37,70.36 R5.1
  Top 0.508: Q2.1 49.37,70.36
N$16
  Top 0.508: Q2.3 39.53,69.22 R44.2
  Top 0.762: Q2.3 R6.2
N$17
  Top 0.381: SV2.22 21.43,38.29 | Q2.2 44.42,72.5 | 49.69,72.6 R4.1
  Top 0.508: 44.42,72.5 LED2.C 49.69,72.6
  Top 0.762: 21.43,38.29 23.34,40.2 23.34,51.62 25.11,53.4 25.11,62.99 28.92,66.8 28.92,72.64 30.13,73.85 32.86,73.85 | 32.86,73.85 31.33,75.38 R1.1 | 32.86,73.85 38.26,73.85 39.08,73.03 43.66,73.03 Q2.2
N$18
  Top 0.254: R55.1 89.69,36.39
  Top 0.381: IC6.10 88.1,37.16 R55.1 | 89.69,36.39 90.26,36.96 90.26,39.56 R53.2 87.84,39.68 IC6.12
N$19  (via drill 0.6, 0.9)
  Top 0.254: R8.2 51.59,61.47 v52.67,60.39 | v64.36,60.39 64.36,57.85 67.15,55.05 70.12,55.05 IC7.S8
  Bottom 0.254: v52.67,60.39 v64.36,60.39
N$21  (1 unrouted)
  Top 0.381: 110.33,18.73 112.62,18.73 113.5,17.84 113.5,10.67 110.55,7.71 R32.1
N$22  (via drill 0.9)
  Top 0.381: IC2.6 110.33,32.26 v109.69,31.62 IC9.1
N$23
  Top 0.254: 49.37,62.74 R8.1
  Top 0.508: Q3.1 49.37,62.74
N$24
  Top 0.508: Q3.3 39.53,61.6 R45.2
  Top 0.762: Q3.3 R9.2
N$25  (1 unrouted)
  Top 0.203: 31.59,71.05 R6.1
  Top 0.381: SV2.20 21.48,35.8 | 49.22,64.96 R7.1
  Top 0.508: Q3.2 46.98,67.2 49.22,64.96
  Top 0.762: 32.86,66.23 31.59,67.5 31.59,71.05 | 21.48,35.8 24.61,38.92 24.61,51.05 26.76,53.21 26.76,62.74 30.26,66.23 32.86,66.23 | 32.86,66.23 38.13,66.23 38.96,65.41 43.66,65.41 Q3.2
N$27
  Top 0.254: 49.52,80 49.52,80.2 R2.1 | Q1.2 44.44,80
  Top 0.381: Q1.2 42.2,82.11
  Top 0.508: 44.44,80 49.52,80 | 26.9,80.05 26.86,79.95
  Top 0.762: Q1.2 42.13,82.17 29.68,82.17 26.9,80.13 26.9,80.05 26.9,66.81 21.81,61.72 21.81,54.58 C16.+
  Top 1.27: L2.2 12.88,45.65 C16.+
  Bottom 1.27: C16.+ 13.64,51.57 IC8.1
N$28  (via drill 0.9)
  Top 0.203: 58.26,42.86 58.77,42.35
  Top 0.254: 51.76,42.41 51.76,42.2 R16.2 | 54.4,42.41 D6.C | IC7.C5 65.66,52.55 63.85,50.74 63.85,44.13 62.07,42.35 58.77,42.35
  Top 0.381: 58.26,42.86 C6.1
  Top 0.508: 51.76,42.41 54.4,42.41 | D6.C v54.45,44.01 | v54.45,44.01 D5.A | v54.45,44.01 57.12,44.01 58.26,42.86
N$29  (via drill 0.9)  (1 unrouted)
  Top 0.381: IC2.7 111.6,27.43 110.58,26.42 106.77,26.42 105.89,27.3 IC9.4
  other vias: 111.47,27.43
N$30
  Top 0.203: S1.5 108.04,18.94 108.04,19.49 108.04,19.75
  Top 0.381: 108.04,19.49 107.16,20.38 IC9.6 | 108.04,19.75 109.57,21.27 117.06,21.27 | J1.4 119.22,32.58 119.22,23.43 117.06,21.27 | J2.4 120.49,17.84 117.06,21.27
N$31
  Top 0.381: J1.3 114.52,29.15 114.52,26.92 112.74,25.15 109.19,25.15 108.42,24.38 | S1.2 107.79,14.73 106.65,15.88 103.85,15.88 103.34,16.38 103.34,23.75 104.87,25.27 107.54,25.27 108.42,24.38 | 108.42,24.38 IC9.7
  Bottom 0.381: J2.3 119.22,17.34 119.22,31.3 J1.3
N$32
  Top 0.381: R31.2 R32.2 112.91,4.86 C25.1
N$33
  Top 0.381: 49.37,55.12 R11.1
  Top 0.508: Q4.1 49.37,55.12
N$34
  Top 0.508: Q4.3 39.53,53.98 R46.2
  Top 0.762: Q4.3 R12.2
N$35  (via drill 0.6, 0.6 pad 0.3)
  Top 0.381: IC4.10 85.82,13.65 88.52,13.65 89.12,14.25 v89.12,14.67 | v75.53,14.61 75.75,14.82 R36.1 | v24.73,19.18 v28.41,19.18 | v60.67,17.14 v66.52,17.14
  Bottom 0.381: SV2.7 20.26,19.18 v24.73,19.18 | v28.41,19.18 28.48,19.24 48.86,19.24 50.96,17.14 v60.67,17.14 | v66.52,17.14 66.58,17.21 67.66,17.21 70.26,14.61 v75.53,14.61 89.06,14.61 v89.12,14.67
N$37  (1 unrouted)
  Top 0.203: 31.59,63.43 R9.1
  Top 0.381: SV2.18 21.43,33.21 | 46.98,59.58 47.45,59.58
  Top 0.508: Q4.2 46.98,59.58 | 47.45,59.58 R10.1
  Top 0.762: 32.86,58.61 31.59,59.88 31.59,63.43 | 21.43,33.21 25.88,37.66 25.88,50.55 28.54,53.21 28.54,57.02 30.13,58.61 32.86,58.61 | 32.86,58.61 38.26,58.61 39.21,57.66 43.78,57.66 Q4.2
N$38  (via drill 0.6, 0.9)
  Top 0.254: v52.29,45.38 51.59,46.08 R14.2 | v62.09,45.38 62.83,46.11 62.83,50.86 65.02,53.05 IC7.S6
  Bottom 0.254: v52.29,45.38 v62.09,45.38
N$39  (via drill 0.9)
  Top 0.254: 51.76,34.68 51.76,34.48 R19.2 | 54.4,34.68 D7.C | IC7.C4 66.69,51.55 65.63,50.48 65.63,39.56 60.67,34.61 C7.1
  Top 0.508: 51.76,34.68 54.4,34.68 | D7.C v54.45,36.26 | v54.45,36.26 D6.A | v54.45,36.26 56.61,36.26 C7.1
N$41  (via drill 0.6, 0.9)
  Top 0.203: R11.2 51.76,54.8
  Top 0.254: IC7.S7 62.08,54.05 v61.18,53.15 | v52.42,53.15 51.59,53.98 R11.2
  Bottom 0.254: v52.42,53.15 v61.18,53.15
N$42  (via drill 0.6, 0.6 pad 0.3)
  Top 0.381: 75.25,20.36 R37.1 75.75,18.5 v75.66,18.41 | IC4.12 88.49,16.26 v89.12,16.89 | v24.73,21.84 v28.41,21.84 | v63.72,20.57 66.26,20.57 v66.9,21.21
  Bottom 0.381: SV2.9 20.2,21.78 24.67,21.78 v24.73,21.84 | v28.41,21.84 50.07,21.84 52.16,19.75 62.9,19.75 v63.72,20.57 | v66.9,21.21 69.69,18.41 v75.66,18.41 77.18,16.89 v89.12,16.89
N$43
  Top 0.381: 49.37,47.5 R14.1
  Top 0.508: Q5.1 49.37,47.5
N$44
  Top 0.508: Q5.3 39.53,46.36 R47.2
  Top 0.762: Q5.3 R15.2
N$45
  Top 0.254: IC7.VREG 79.78,53.55 C21.1 80.78,54.55 IC7.MMB
N$46  (1 unrouted)
  Top 0.254: R52.1 41.6,6.64
  Top 0.508: 41.6,6.64 44.04,6.64
N$47  (via drill 0.6, 0.9)  (1 unrouted)
  Top 0.254: 51.76,11.93 51.76,11.72 R28.2 | 54.4,11.93 D10.C | 58.38,11.87 65.63,11.87 70.45,16.7 70.45,45.97 v70.96,46.48 | 78,50.05 IC7.C1 77.9,50.04 79.47,50.04 79.6,49.91 79.6,47.62 78.58,46.61 v74.9,46.61
  Top 0.508: 51.76,11.93 54.4,11.93 | D10.C v54.45,13.65 | v54.45,13.65 D9.A | v54.45,13.65 56.36,13.65 C10.1
  Bottom 0.254: v70.96,46.48 74.77,46.48 v74.9,46.61
N$48
  Top 0.381: 44.08,14.16 LED10.A
  Top 0.508: R51.1 44.08,14.16
N$49  (1 unrouted)
  Top 0.254: R50.1 41.6,21.88
  Top 0.508: 41.6,21.88 44.04,21.88
N$50
  Top 0.381: 44.08,29.4 LED8.A
  Top 0.508: R49.1 44.08,29.4
N$51  (1 unrouted)
  Top 0.254: R48.1 41.6,37.12
  Top 0.508: 41.6,37.12 44.04,37.12
N$52
  Top 0.381: 49.37,39.88 R17.1
  Top 0.508: Q6.1 49.37,39.88
N$53
  Top 0.508: Q6.3 39.53,38.74 R48.2
  Top 0.762: Q6.3 R18.2
N$54  (2 unrouted)
  Top 0.203: 31.59,48.19 R15.1
  Top 0.254: 46.88,44.23 46.88,44.64 | Q6.2 44.44,41.8 | R16.1 49.52,42.2
  Top 0.381: SV2.14 21.43,28.13
  Top 0.508: 44.44,41.8 46.88,44.23 | 49.52,42.2 47.08,44.64
  Top 0.762: 31.68,44.55 31.59,44.64 31.59,48.19 | 31.68,44.55 32.86,43.37 38.13,43.37 39.08,42.42 43.78,42.42 Q6.2 | 21.43,28.13 27.78,34.48 27.78,35.18 29.05,36.45 29.05,43.18 30.41,44.55 31.68,44.55
N$55  (via drill 0.6, 0.9)
  Top 0.203: 51.66,31.94 R20.2
  Top 0.254: v52.29,30.29 51.66,30.92 51.66,31.94 | v62.2,30.29 66.39,34.48 66.39,50.23 67.21,51.05 IC7.S4
  Bottom 0.254: v52.29,30.29 v62.2,30.29
N$56  (via drill 0.9)  (1 unrouted)
  Top 0.254: 51.76,27.16 51.76,26.96 R22.2 | 54.4,27.16 D8.C | 58.38,27.11 60.93,27.11 67.15,33.34 67.15,49.72 67.98,50.55 IC7.C3 | 58.26,27.16 58.06,27.37 C8.1 58.26,27.16
  Top 0.381: C8.1 58.26,27.37
  Top 0.508: 51.76,27.16 54.4,27.16 | D8.C v54.45,29.02 | v54.45,29.02 D7.A | v54.45,29.02 56.23,29.02 C8.1
N$57
  Top 0.381: 44.08,44.64 LED6.A
  Top 0.508: R47.1 44.08,44.64
N$58
  Top 0.254: 49.52,32.24 49.52,32.04 R20.1 | Q7.1 44.44,32.24
  Top 0.508: 44.44,32.24 49.52,32.24
N$59
  Top 0.254: R49.2 39.57,29.4
  Top 0.508: Q7.3 39.53,31.12 R49.2
  Top 0.762: Q7.3 R21.2
N$60  (2 unrouted)
  Top 0.203: 31.59,40.57 R18.1
  Top 0.254: 46.88,36.72 46.88,36.92 | Q7.2 44.44,34.28 | R19.1 49.52,34.48
  Top 0.381: SV2.12 21.43,25.59
  Top 0.508: 44.44,34.28 46.88,36.72 | 49.52,34.48 47.08,36.92
  Top 0.762: 32.86,35.75 31.59,37.02 31.59,40.57 | 21.43,25.59 29.05,33.21 29.05,34.48 30.32,35.75 32.86,35.75 | 32.86,35.75 38.13,35.75 39.08,34.8 43.78,34.8 Q7.2
N$61  (via drill 0.6, 0.9)
  Top 0.254: R23.2 51.59,23.01 v52.06,22.54 | IC7.S3 68.5,50.05 67.91,49.47 67.91,24.83 65.27,22.19 v61.89,22.19
  Bottom 0.254: v52.06,22.54 61.49,22.54 v61.89,22.19
N$62  (via drill 0.9)
  Top 0.254: 51.76,49.92 51.76,49.72 R13.2 | 54.4,49.92 D5.C | IC7.C6 64.5,53.55 60.8,49.85 C5.1
  Top 0.508: 51.76,49.92 54.4,49.92 | D5.C v54.45,51.75 | v54.45,51.75 D4.A | v54.45,51.75 56.36,51.75 C5.1
N$63  (1 unrouted)
  Top 0.254: R46.1 41.6,52.36
  Top 0.508: 41.6,52.36 44.04,52.36
N$64
  Top 0.254: 49.52,24.52 49.52,24.32 R23.1 | Q8.1 44.44,24.52
  Top 0.508: 44.44,24.52 49.52,24.52
N$65
  Top 0.381: 44.08,59.88 LED4.A
  Top 0.508: R45.1 44.08,59.88
N$66
  Top 0.508: Q8.3 39.53,23.5 R50.2
  Top 0.762: Q8.3 R24.2
N$67  (2 unrouted)
  Top 0.203: 31.59,32.95 R21.1
  Top 0.254: 46.88,28.99 46.88,29.4 | Q8.2 44.44,26.55 | R22.1 49.52,26.96
  Top 0.381: SV2.10 21.43,23.05
  Top 0.508: 44.44,26.55 46.88,28.99 | 49.52,26.96 47.08,29.4
  Top 0.762: 32.86,28.13 31.59,29.4 31.59,32.95 | 21.43,23.05 26.51,28.13 32.86,28.13 | 32.86,28.13 38.26,28.13 39.21,27.18 43.78,27.18 Q8.2
N$68  (via drill 0.6, 0.9)
  Top 0.254: R26.2 51.59,15.75 v52.29,15.05 | v61.82,15.05 66.52,15.05 69.44,17.97 69.44,46.99 v70.2,47.75 | v77.94,47.75 77.94,49.49 IC7.S2
  Bottom 0.254: v52.29,15.05 v61.82,15.05 | v70.2,47.75 v77.94,47.75
N$69  (1 unrouted)
  Top 0.254: R44.1 41.6,67.6
  Top 0.381: 41.6,67.6 44.04,67.6
N$70
  Top 0.381: 44.2,75.12 LED2.A
  Top 0.508: R33.1 44.2,75.12
N$71
  Top 0.254: 49.52,17 49.52,16.8 R26.1 | Q9.1 44.44,17
  Top 0.508: 44.44,17 49.52,17
N$72
  Top 0.508: Q9.3 39.53,15.88 R51.2
  Top 0.762: Q9.3 R27.2
N$73  (2 unrouted)
  Top 0.254: 46.88,21.48 46.88,21.68 | 44.44,19.04 Q9.2 44.24,19.04 | R25.1 49.52,19.24 | 31.44,25.54 R24.1
  Top 0.508: 44.44,19.04 46.88,21.48 | 49.52,19.24 47.08,21.68
  Top 0.762: Q9.2 43.78,19.56 39.21,19.56 38.21,20.56 32.86,20.56 | SV2.8 32.86,20.56 | 31.44,25.54 31.44,21.98 32.86,20.56
N$75  (via drill 0.9)
  Top 0.254: 51.76,19.44 51.76,19.24 R25.2 | 54.4,19.44 D9.C | IC7.C2 69.01,49.55 68.67,49.21 68.67,21.02 67.03,19.37 C9.1
  Top 0.508: 51.76,19.44 54.4,19.44 | D9.C v54.45,21.14 | v54.45,21.14 D8.A | v54.45,21.14 56.48,21.14 C9.1
N$76  (via drill 0.6, 0.6 pad 0.3)
  Top 0.381: v75.35,22.03 75.75,22.43 R38.1 77.17,25.59 IC5.5 | v24.73,24.26 v29.05,24.26 | v60.67,24.26 v65.37,24.26
  Bottom 0.381: v75.35,22.03 69.94,22.03 67.66,24.32 65.44,24.32 v65.37,24.26 | SV2.11 20.26,24.26 v24.73,24.26 | v29.05,24.26 29.11,24.32 29.18,24.26 v60.67,24.26
N$77
  Top 0.254: 49.52,9.28 49.52,9.08 R29.1 | Q10.1 44.44,9.28
  Top 0.508: 44.44,9.28 49.52,9.28
N$78
  Top 0.508: Q10.3 39.53,8.26 R52.2
  Top 0.762: Q10.3 R30.2
N$79  (3 unrouted)
  Top 0.254: 46.88,13.75 46.88,14.16 | 44.44,11.31 Q10.2 44.24,11.31 | R28.1 49.52,11.72 | R27.1 31.23,17.82
  Top 0.508: 44.44,11.31 46.88,13.75 | 49.52,11.72 47.08,14.16
  Top 0.762: 31.59,17.71 31.59,14.16 32.86,12.89 38.13,12.89 39.08,11.94 43.78,11.94 Q10.2 | SV2.6 31.28,18.02 R27.1
N$80  (via drill 0.6, 0.9)
  Top 0.254: v61.82,6.67 65.22,6.67 71.34,12.66 71.39,42.98 71.39,44.63 v71.59,44.83 | v51.53,6.67 51.59,6.73 R29.2 | IC7.S1 79.85,50.55 80.23,50.16 80.23,46.48 v80.1,46.35
  Bottom 0.254: v51.53,6.67 v61.82,6.67 | v71.59,44.83 78.58,44.83 v80.1,46.35
N$81  (via drill 0.9)
  Top 0.254: 51.76,57.65 51.76,57.44 R10.2 | 54.4,57.65 D4.C | IC7.C7 63.59,54.55 60.8,57.34 58.39,57.34 C4.1
  Top 0.508: 51.76,57.65 54.4,57.65 | D4.C v54.45,59.12 | v54.45,59.12 D3.A | v54.45,59.12 56.61,59.12 C4.1
N$82  (via drill 0.9)  (2 unrouted)
  Top 0.203: IC7.C8 70.04,55.54
  Top 0.254: 51.76,65.16 51.76,64.96 R7.2 | 54.4,65.16 D3.C 54.6,65.37 | 58.38,65.21 64.61,65.21 65.88,63.94 65.88,57.34 67.66,55.56 70.11,55.56
  Top 0.508: 51.76,65.16 54.4,65.16 | D3.C v54.45,66.74 | v54.45,66.74 D2.A | v54.45,66.74 56.61,66.74 C3.1
N$83  (via drill 0.9)  (1 unrouted)
  Top 0.254: 51.76,72.48 R4.2 51.76,72.68 51.76,72.89 | C2.1 65.65,72.71 67.4,70.95 67.4,57.78 68.64,56.55 IC7.C9
  Top 0.508: 51.76,72.89 54.4,72.89 | v54.45,74.36 D1.A | v54.45,74.36 D2.C | v54.45,74.36 56.61,74.36 C2.1
N$84  (via drill 0.9)
  Top 0.254: 51.76,80.4 51.76,80.2 R2.2 | 54.4,80.4 D1.C 54.6,80.4 | 58.67,80.2 58.26,80.2 C1.1 | C1.1 58.26,80.4 | IC7.C10 69.35,57.55 68.8,58.1 68.8,58.61 | 68.8,58.61 68.8,59.63 | 68.8,59.63 68.8,77.91 66.39,80.33 C1.1 | IC7.V+ IC7.C12 68.88,59.55 68.8,59.63 | IC7.C11 68.86,58.55 68.8,58.61
  Top 0.381: 56.12,80.4 56.23,80.51
  Top 0.508: 54.4,80.4 51.76,80.4 | 58.26,80.4 56.12,80.4 54.6,80.4 | 56.23,80.51 v56.23,82.17
N$85  (via drill 0.6, 0.6 pad 0.3)
  Top 0.381: v75.35,25.84 75.75,26.23 R39.1 75.91,28.14 IC5.3 | v60.67,25.78 v66.64,25.78 | v26.89,26.8 v29.3,26.8
  Bottom 0.381: SV2.13 20.3,26.89 20.39,26.8 v26.89,26.8 | v60.67,25.78 60.61,25.84 50.39,25.84 49.37,26.86 29.37,26.86 v29.3,26.8 | v66.64,25.78 75.29,25.78 v75.35,25.84
N$86  (via drill 0.6, 0.6 pad 0.3)
  Top 0.381: v88.23,26.86 88.23,26.35 87.47,25.59 87.44,25.62 IC5.10 | v75.66,29.84 75.75,29.93 R40.1 | v27.02,29.46 v30.07,29.46 | v63.47,27.81 64.1,27.81 v66.13,29.84
  Bottom 0.381: v88.23,26.86 88.23,27.37 85.75,29.84 v75.66,29.84 v66.13,29.84 | SV2.15 20.2,29.4 26.95,29.4 v27.02,29.46 | v30.07,29.46 49.37,29.46 51.02,27.81 v63.47,27.81
N$87  (via drill 0.6, 0.6 pad 0.3)  (1 unrouted)
  Top 0.381: 85.8,28.08 87.5,28.08 88.26,28.84 v88.26,29.35 | v75.66,33.66 75.75,33.74 R41.1 | v60.93,32.38 62.83,32.38 v64.23,33.78
  Bottom 0.381: v88.26,29.35 88.26,31.41 86.01,33.66 v75.66,33.66 64.36,33.66 v64.23,33.78 | SV2.17 20.2,31.94 60.48,31.94 v60.93,32.38
N$88  (via drill 0.6, 0.6 pad 0.3)
  Top 0.381: v75.66,37.47 75.75,37.55 | 75.75,37.55 R42.1 | 75.75,37.55 76.17,37.13 IC6.5 | v62.45,34.92 64.99,37.47 v65.12,37.47
  Bottom 0.381: v62.45,34.92 61.82,34.29 51.15,34.29 49.5,35.94 30.83,35.94 29.43,34.54 20.14,34.54 SV2.19 | v65.12,37.47 v75.66,37.47
N$89  (via drill 0.6, 0.6 pad 0.3)
  Top 0.381: v75.66,41.27 75.75,41.36 | 75.75,41.36 R43.1 | 75.75,41.36 75.83,41.27 77.31,41.27 78.91,39.68 IC6.3 | v60.67,41.27 v63.47,41.27
  Bottom 0.381: SV2.21 20.16,39.62 32.61,39.62 34.26,41.27 v60.67,41.27 | v63.47,41.27 v75.66,41.27
N$132  (via drill 0.6, 0.6 pad 0.3)
  Top 0.381: v75.35,10.6 75.75,10.99 R35.1 75.75,12.79 79.09,16.13 80.8,16.13 IC4.3 | v24.73,16.64 v28.41,16.64
  Bottom 0.381: SV2.5 20.26,16.64 v24.73,16.64 | v28.41,16.64 28.48,16.7 40.48,16.7 46.58,10.6 v75.35,10.6
PE0
  Top 0.254: IC1.56 94.9,54.84 JP8.1
PE1
  Top 0.254: IC1.55 93.5,59.38 93.06,58.93 93.06,55.53 JP8.2
PE2
  Top 0.254: IC1.54 93.27,60.02 92.3,59.05 92.3,57.31 JP8.3
PE3
  Top 0.254: IC1.53 93.03,60.67 91.41,59.05 91.41,57.66 88.49,54.74 87.18,54.74 JP8.4
RST  (via drill 0.6)
  Top 0.305: IC1.42 92.86,67.83 90.01,70.67 v90.01,73.66
  Bottom 0.305: JP2.4 88.74,74.93 v90.01,73.66
RXCAN_SLV  (via drill 0.9)  (1 unrouted)
  Top 0.305: 119.35,67.82 116.11,67.82
  Top 0.381: 119.35,67.82 v120.36,66.8 120.49,66.67 120.49,52.13 120.11,51.75 119.47,51.24 114.01,51.24 111.6,48.83 IC2.2
SCKI  (via drill 0.6, 0.9)
  Top 0.254: IC7.SCKI 83.7,58.55 v84.65,57.6 | v88.99,61.91 89.71,62.62 IC1.50
  Bottom 0.254: v88.99,61.91 84.68,57.6 v84.65,57.6
SDI  (via drill 0.6, 0.9)
  Top 0.254: IC7.SDI 85.5,59.05 v87.44,57.1 | v91.03,61.28 91.72,61.98 IC1.51
  Bottom 0.254: v91.03,61.28 87.7,57.95 v87.44,57.1
SDO  (via drill 0.9)
  Top 0.254: IC7.SDO 90.95,59.55 | 90.95,59.55 92.68,61.28 94.86,61.28 IC1.52 | 90.95,59.55 90.01,58.61 v90.01,58.42
TXCAN_SLV  (via drill 0.9)
  Top 0.305: IC1.98 118.47,67.17 119.22,66.42
  Top 0.381: IC2.3 110.33,49.47 113.5,52.64 118.58,52.64 119.22,53.28 v119.22,65.28 119.22,66.42
VDD1
  Top 0.254: C13.2 107.79,81.4
  Top 0.305: IC1.13 106.48,79.33 107.66,80.52 107.66,81.41 C13.2
VDD2  (1 unrouted)
  Top 0.254: 101.95,56.88 101.95,56.13 99.92,54.1 96.94,54.1 C19.1
VDDPLL
  Top 0.254: 95.04,66.59 IC1.44 | 95.04,67.19 IC1.43 95.04,67.04
  Top 0.305: IC1.43 92.24,67.17 88.23,71.18 C17.1
  Top 0.381: 95.04,67.04 95.04,66.59
XTAL
  Top 0.254: C12.1 81.02,63.94 | 84.22,63.94 X1.1
  Top 0.305: IC1.47 85.77,64.58 X1.1
  Top 0.381: 81.02,63.94 84.22,63.94

## Text on the board
tPlace: C10 | DKBG | PWR | S10 | GND | RST | C9 | VDD | S9 | CRX | C8 | CTX | VDD | GND | CSBI | S8 | C7 | SDO | SCKI | SDI | S7 | C6 | PE1 | PE0 | PE3 | PE2 | S6 | C5 | AN0 | C4 | S5 | Formule Électrique | AN2 | TX | BMS Esclave V1.0 | AN6 | S4 | AN4 | C3 | RX | AN5 | S3 | AN7 | C2 | AN1 | AN8 | S2 | HIGH VOLTAGE | C1 | AN9 | V | OFF / ON | TMP | S1 | AN3 | AN9_JMP